# Altium PCB DL.PcbDoc
Units mil, origin at the board's own origin, x right, y up, seen from the top; angles counter-clockwise.
Board outline 6000 x 4000 mil, 2 copper layers (Top Layer, Bottom Layer); 13 components, 17 nets, 56 pads, 4 vias.
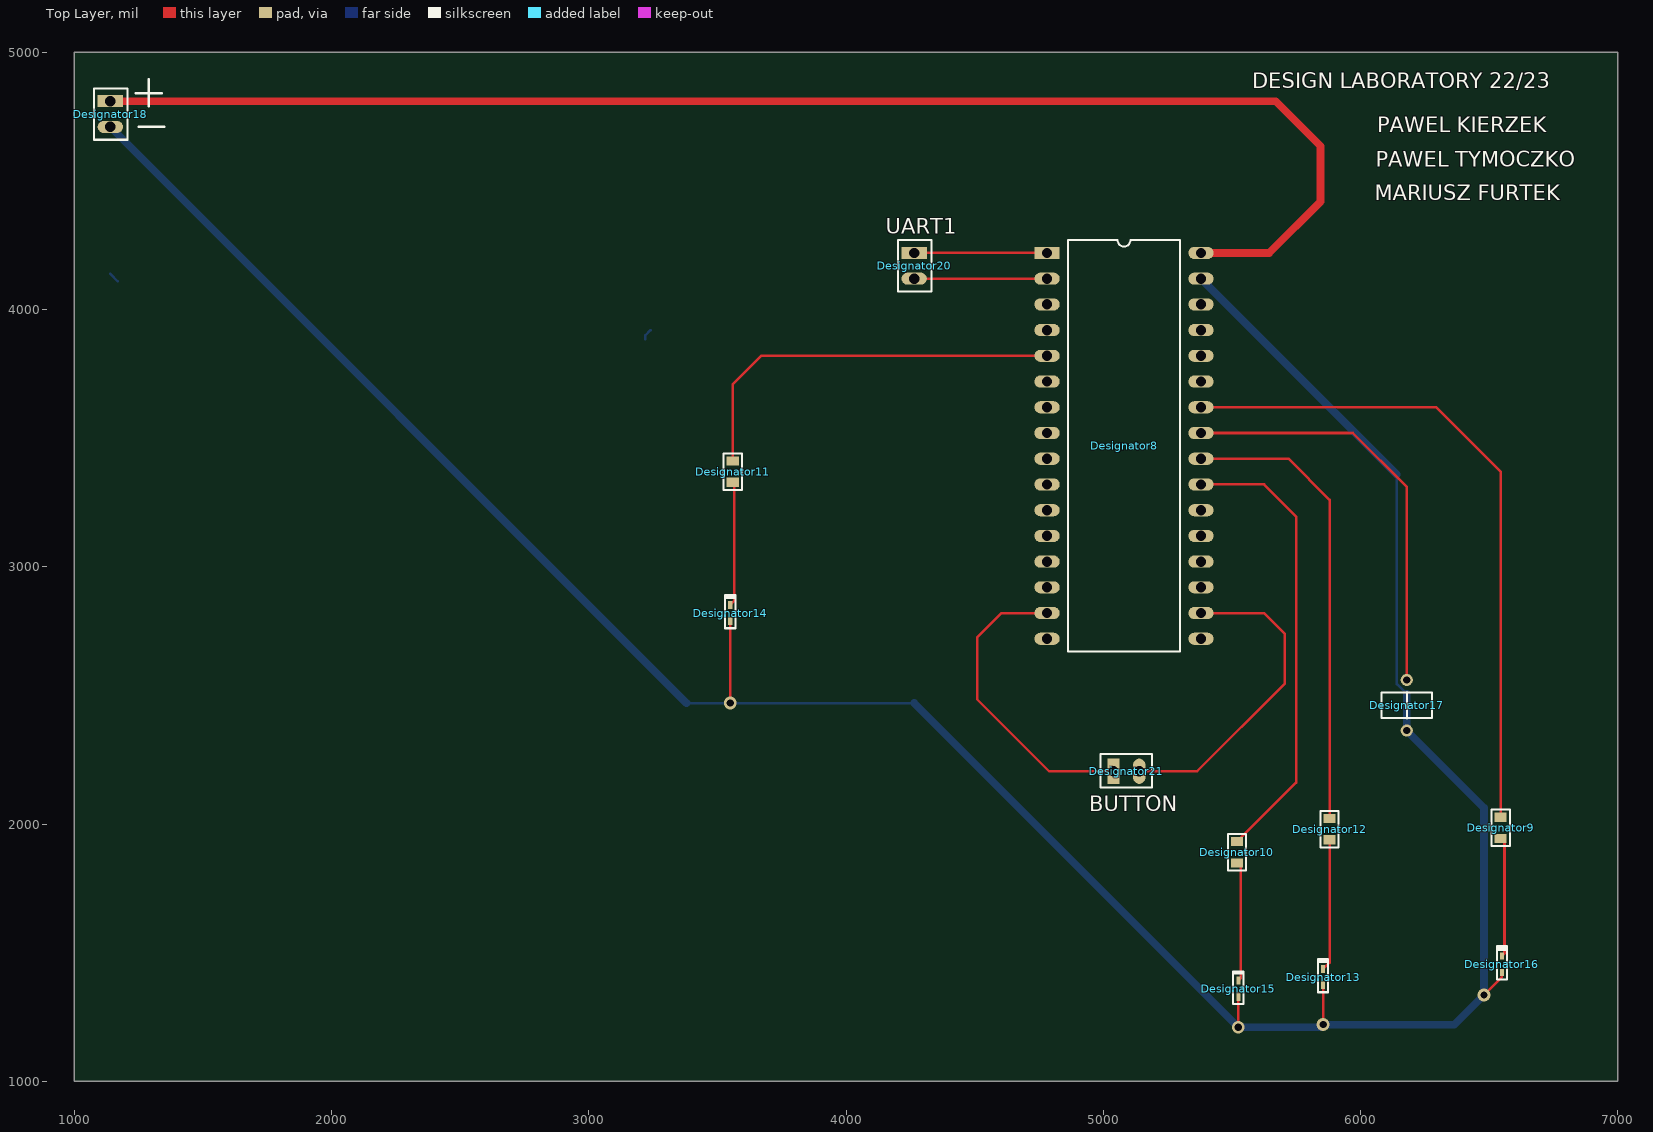
[diagram p0: Top Layer view]
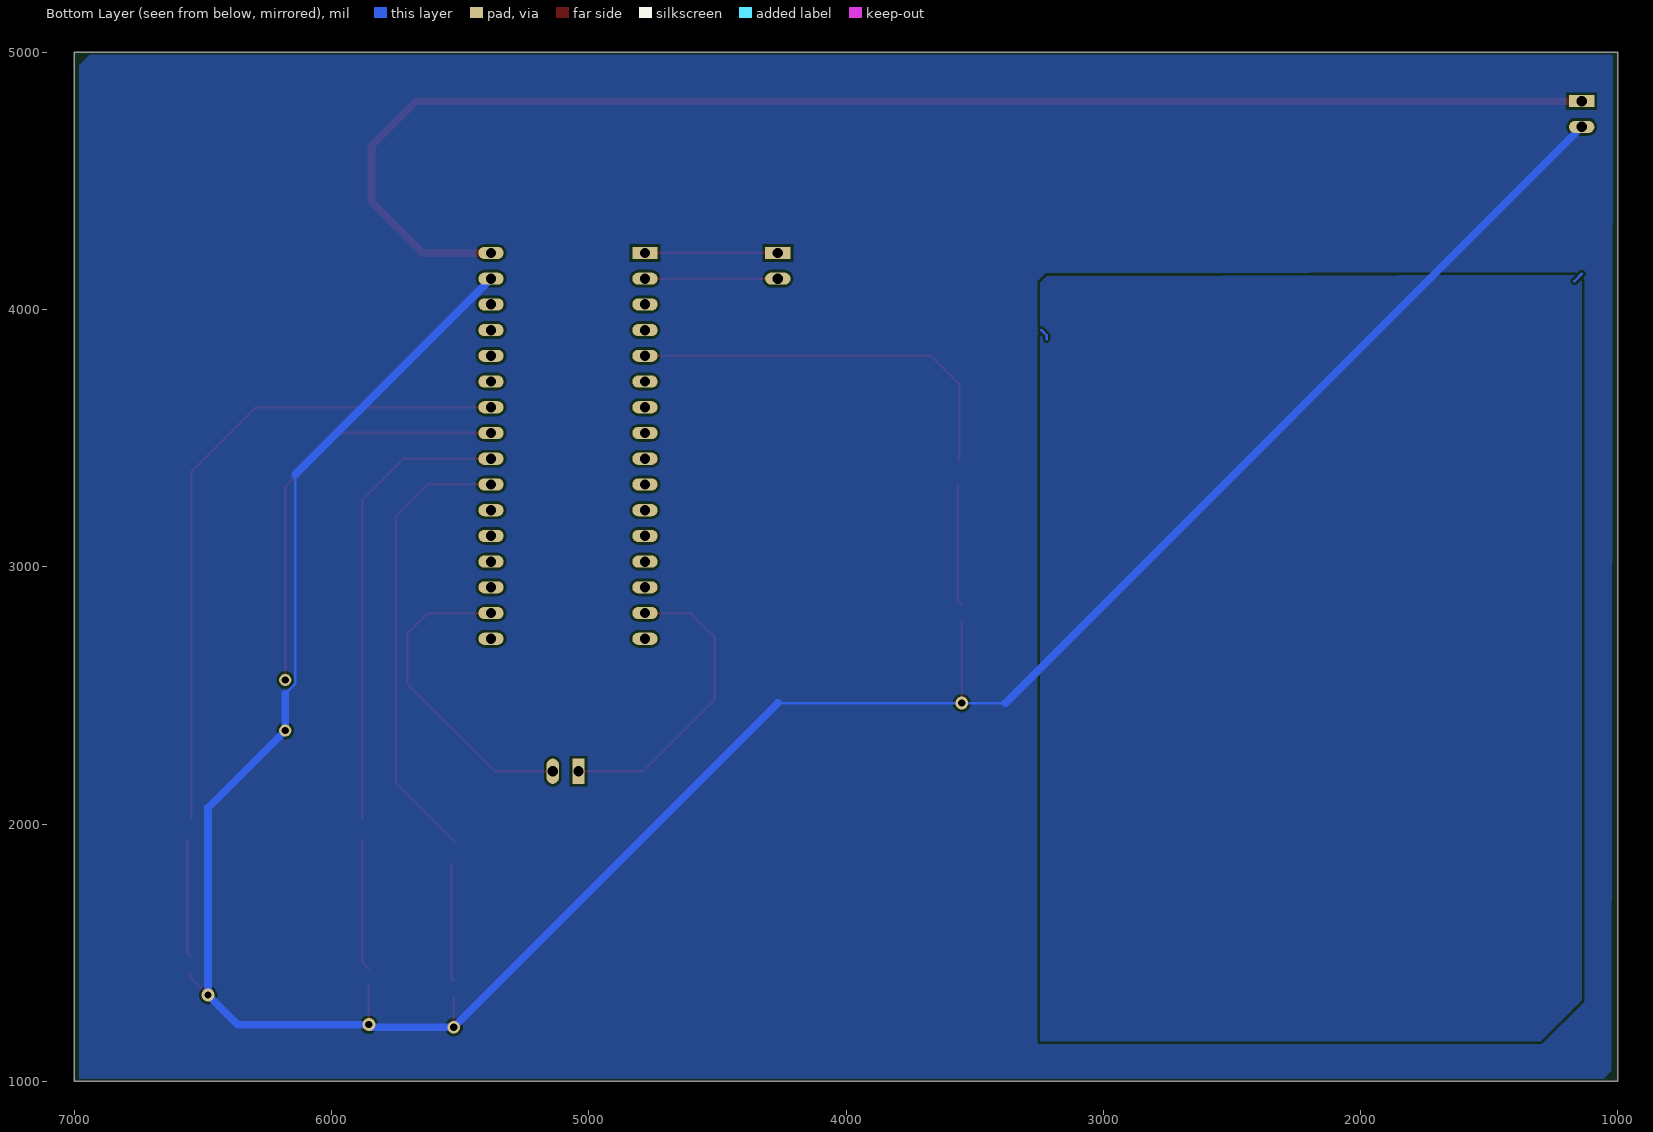
[diagram p1: Bottom Layer view, seen from below]

## Layer stack, top to bottom
Top Solder: solder mask 0.4, Solder Resist, Dk 3.5
Top Layer: signal copper 1.4
Dielectric 1: dielectric 12.6, FR-4, Dk 4.8
Bottom Layer: signal copper 1.4
Bottom Solder: solder mask 0.4, Solder Resist, Dk 3.5

## Board outline
1000,1000 7000,1000 7000,5000 1000,5000

## Design rules (kind name [scope] priority, off if disabled: settings)
Clearance [All] p1: gap=10 ignorepadtopadclearanceinfootprint=FALSE except(0: Arc-Hole Track-Hole SMDPad-Hole THPad-Hole Via-Hole Fill-Hole Poly-Hole Region-Hole Text-Hole)
PolygonConnect [All] p1: connectstyle=Relief reliefconductorwidth=10 reliefentries=4 polygonreliefangle="90 Angle" airgapwidth=10
RoutingVias [All] p1: holewidth=28 width=50 viastyle="Through Hole" minholewidth=28 minwidth=50 maxholewidth=28 maxwidth=50
SolderMaskExpansion [All] p1: expansion=4 istentingtop=FALSE
Width [All] p1: maxlimit=10 minlimit=10 preferedwidth=10
30 further rules are at their usual default settings.

## Components (designator, comment, footprint, x,y, rotation, side; value= is the part's Value field where it differs from the comment)
Designator8 "Comment" DIP32 4781.57,4220 r0 top
Designator9 "Comment" R0805 6545,1985 r90 top
Designator10 "Comment" R0805 5520,1890 r90 top
Designator11 "Comment" R0805 3560,3370 r90 top
Designator12 "Comment" R0805 5880,1980 r90 top
Designator13 "Comment" LED_BLUE 5855,1405 r90 top
Designator14 "Comment" LED_BLUE 3550,2820 r90 top
Designator15 "Comment" LED_Yellow 5525,1360 r90 top
Designator16 "Comment" LED_GREEN 6550,1455 r90 top
Designator17 "Comment" BUZZ 6180,2363.15 r90 top
Designator18 "Comment" Power 1140,4810 r0 top
Designator20 "Comment" Power 4265,4220 r0 top
Designator21 "Comment" Power 5040,2205 r90 top

## Footprints (in the part's own frame and the unit in brackets; to place one, negate y for a bottom-side part, rotate by r counter-clockwise, add the part's x,y. Pads: shape width x height; smd on the part's side, far side on the other; paste and mask are expansions set on the pad)
BUZZ [mm]
  round 1.2 hole 0.7: 28(5,0) 29(0,0)
  silkscreen extent 1.2,-2.5 3.8,2.5, body extent -3.6,-6.1 8.6,6.1, height 6.89
DIP32 [mm]
  rect 2.5x1.2 hole 1.02: 1(0,0)
  oval 2.5x1.2 hole 1.02: 2(0,-2.54) 3(0,-5.08) 4(0,-7.62) 5(0,-10.16) 6(0,-12.7) 7(0,-15.24) 8(0,-17.78) 9(0,-20.32) 10(0,-22.86) 11(0,-25.4) 12(0,-27.94) 13(0,-30.48) 14(0,-33.02) 15(0,-35.56) 16(0,-38.1) 17(15.2,-38.1) 18(15.2,-35.56) 19(15.2,-33.02) 20(15.2,-30.48) 21(15.2,-27.94) 22(15.2,-25.4) 23(15.2,-22.86) 24(15.2,-20.32) 25(15.2,-17.78) 26(15.2,-15.24) 27(15.2,-12.7) 28(15.2,-10.16) 29(15.2,-7.62) 30(15.2,-5.08) 32(15.2,0)
  oval 2.5x1.2 hole 1.02 paste+0: 31(15.2,-2.54)
  silkscreen extent 2.08,-39.37 13.12,1.27, body extent -1.2,-39.6 16.4,1.55, height 8.51
LED_BLUE [mm]
  rect 0.8x0.4 smd: 20(-0.8,0) 21(0.8,0)
  silkscreen extent -1.5,-0.5 1.8,0.5, body extent -0.8,-0.4 0.8,0.4, height 0.55
LED_GREEN [mm]
  rect 0.7x0.4 smd: 18(0.8,0) 19(-0.8,0)
  silkscreen extent -1.5,-0.5 1.8,0.5, body extent -0.8,-0.4 0.8,0.4, height 0.55
LED_Yellow [mm]
  rect 0.8x0.4 smd: 22(0.8,0) 23(-0.8,0)
  silkscreen extent -1.5,-0.5 1.7,0.5, body extent -0.8,-0.4 0.8,0.4, height 0.55
Power [mm]
  rect 2.5x1.2 hole 1.02: 1(0,0)
  oval 2.5x1.2 hole 1.02: 2(0,-2.54)
  silkscreen extent -1.6,-3.81 1.7,1.27, body extent -1.37,-4.09 1.17,1.49, height 8.51
R0805 [mm]
  rect 0.9x1.2 smd: 26(-1.05,0) 27(1.05,0)
  silkscreen extent -1.8,-0.9 1.8,0.9, body extent -1,-0.63 1,0.63, height 0.61

## Via types
v1: diameter 50, hole 28, Top Layer to Bottom Layer, 3 vias
v2: diameter 50/50 (per signal layer), hole 28, Top Layer to Bottom Layer, 1 vias

## Nets (pads, with @x,y where several pads share a name; then routed paths per layer and width w, separated by ;. In a path a pad name is that pad's centre, name@x,y a point inside that pad or via, vN(x,y) a via of type N, cw(c..) or ccw(c..) an arc to the next point about the centre after c; other vN are vias at no path point)
0-24: 
1-24: 
1-25: 
4-27: 
5-25: 
6-26: 
7-24: 
7-28: 
8-27: 
9-27: 
14-24: 
29-gnd: Designator8.31 Designator17.29 Designator18.2 | length 10082.2
  Bottom Layer w10: 3380,2470 v2(3550,2470) 4265,2470 ; v1@5845,1210 v1(5855,1220) ; 6141.38,3358.62 6141.38,2544 6180,2505.38
  Bottom Layer w30: Designator18.2 3380,2470 ; 4265,2470 v1(5525,1210) v1@5845,1210 ; Designator8.31 6141.38,3358.62 ; v1(5855,1220) 6365,1220 v1(6480,1335) 6480,2063.15 Designator17.29 6180,2505.38
NetD1_20: 
NetD2_23: 
NetD3_19: 
NetD4_20: 
NetH1_0: 
pads on no net: Designator8.1 Designator8.2 Designator8.3 Designator8.4 Designator8.5 Designator8.6 Designator8.7 Designator8.8 Designator8.9 Designator8.10 Designator8.11 Designator8.12 Designator8.13 Designator8.14 Designator8.15 Designator8.16 Designator8.17 Designator8.18 Designator8.19 Designator8.20 Designator8.21 Designator8.22 Designator8.23 Designator8.24 Designator8.25 Designator8.26 Designator8.27 Designator8.28 Designator8.29 Designator8.30 Designator8.32 Designator9.26 Designator9.27 Designator10.26 Designator10.27 Designator11.26 Designator11.27 Designator12.26 Designator12.27 Designator13.20 Designator13.21 Designator14.20 Designator14.21 Designator15.22 Designator15.23 Designator16.18 Designator16.19 Designator17.28 Designator18.1 Designator20.1 Designator20.2 Designator21.1 Designator21.2
copper on no net: | length 21176.6
  Top Layer w10: 3550,2485 3550,2520 3550,2788.5 ; 3550,2851.5 3565,2866.5 3565,3315 ; 3560,3411.34 3560,3710 3670,3820 4781.57,3820 ; 4265,4120 4781.57,4120 ; 4265,4220 4781.57,4220 ; 4759.65,3920 4781.57,3920 ; 4781.57,2820 4605,2820 4510,2725 4510,2485 4790,2205 5040,2205 ; 5140,2205 5365,2205 5705,2545 5705,2740 5625,2820 5380,2820 ; 5380,3320 5625,3320 5750,3195 5750,2161.34 5520,1931.34 ; 5380,3420 5720,3420 5880,3260 5880,2021.34 ; 5380,3520 5970,3520 6180,3310 6180,2560 ; 5380,3620 6295,3620 6545,3370 6545,2026.34 ; 5525,1210 5525,1328.5 ; 5525,1391.5 5535,1401.5 5535,1845 ; 5855,1220 5855,1373.5 ; 5855,1436.5 5880,1461.5 5880,1938.66 ; 6480,1335 6550,1405 ; 6550,1486.5 6560,1496.5 6560,1935 ; 6550,1405 6550,1423.5 ; 6550,1405 6550,1423.5 ; 6550,1405 6550,1423.5 ; 6550,1405 6550,1423.5
  Top Layer w30: 1140,4810 5265,4810 5670,4810 5845,4635 5845,4420 5645,4220 5380,4220
  Bottom Layer w10: 1140,4138.53 1168.53,4110 ; 3220,3885 3220,3900 3240,3920

## Polygon pours and split planes (outlines as drawn)
no net on Bottom Layer "NONET_L02_P003" (solid, pour order 3): 1020,4990 6940,4990 6980,4950 6980,1010 1055,1010 1025,1040
no net on Bottom Layer "NONET_L02_P001" (solid, pour order 1): 1140,4135 1140,1315 1300,1155 3245,1155 3245,4105 3220,4130

## Silkscreen, mask and mechanical layers (free items; w line width, h text height)
Top Overlay:
  lines w10: 1240,4840 1340,4840 ; 1250,4710 1350,4710 ; 1290,4790 1290,4895
  text "DESIGN LABORATORY 22/23" at 5580,4860 h60
  text "PAWEL KIERZEK" at 6065,4690 h60
  text "PAWEL TYMOCZKO" at 6060,4555 h60
  text "MARIUSZ FURTEK" at 6055,4425 h60
  text "UART1" at 4155,4295 h60
  text "BUTTON" at 4945,2050 h60

## Text inside footprints (layer, text, board x,y; h text height)
Designator8: Top Assembly "USB_THIS_SIDE" at 4895.85,4279.18 h30